# EAGLE board PCB 1d (EAGLE 9.0.1)
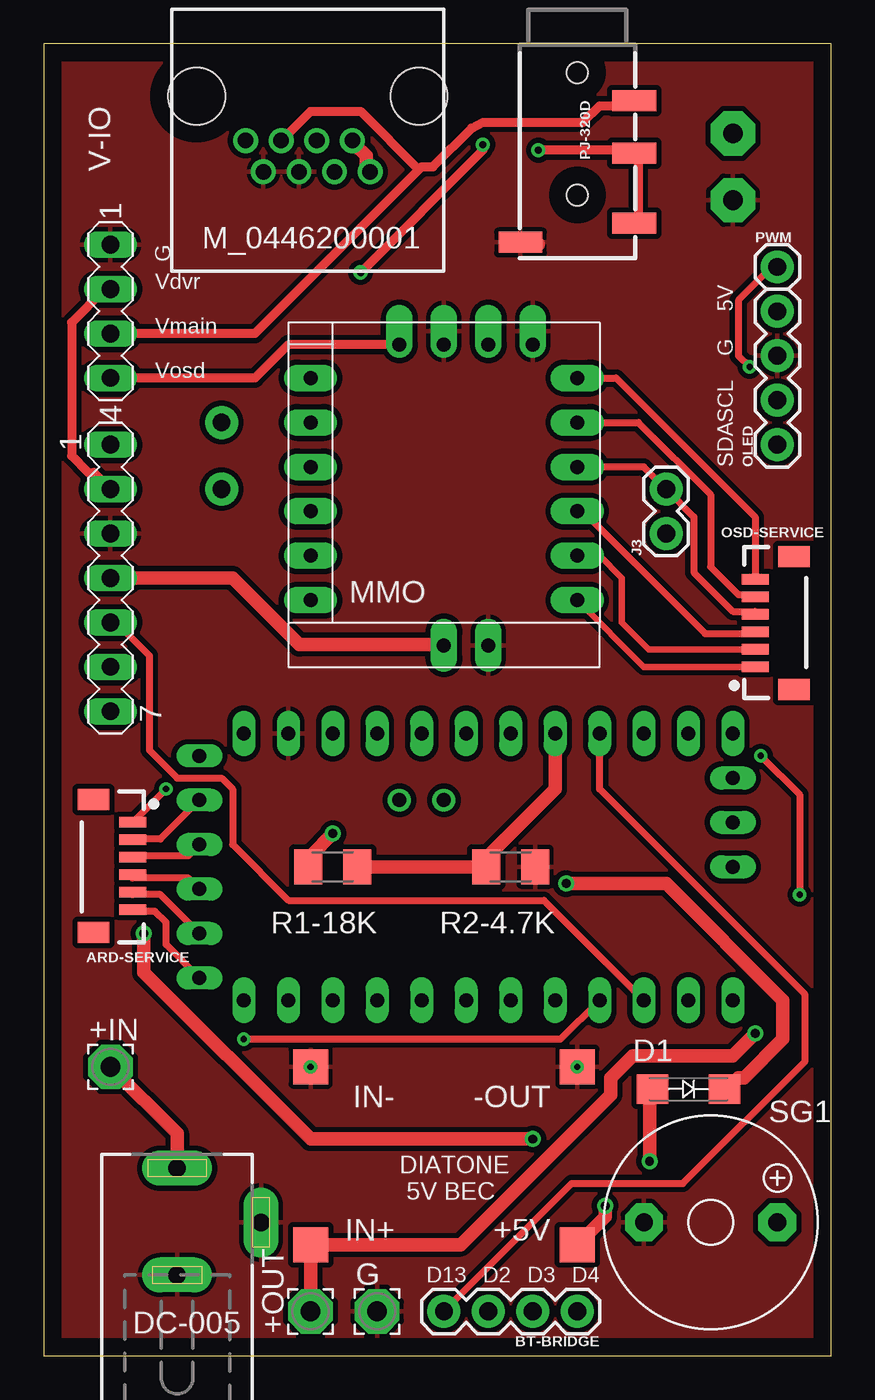
[diagram p0: board, top side]
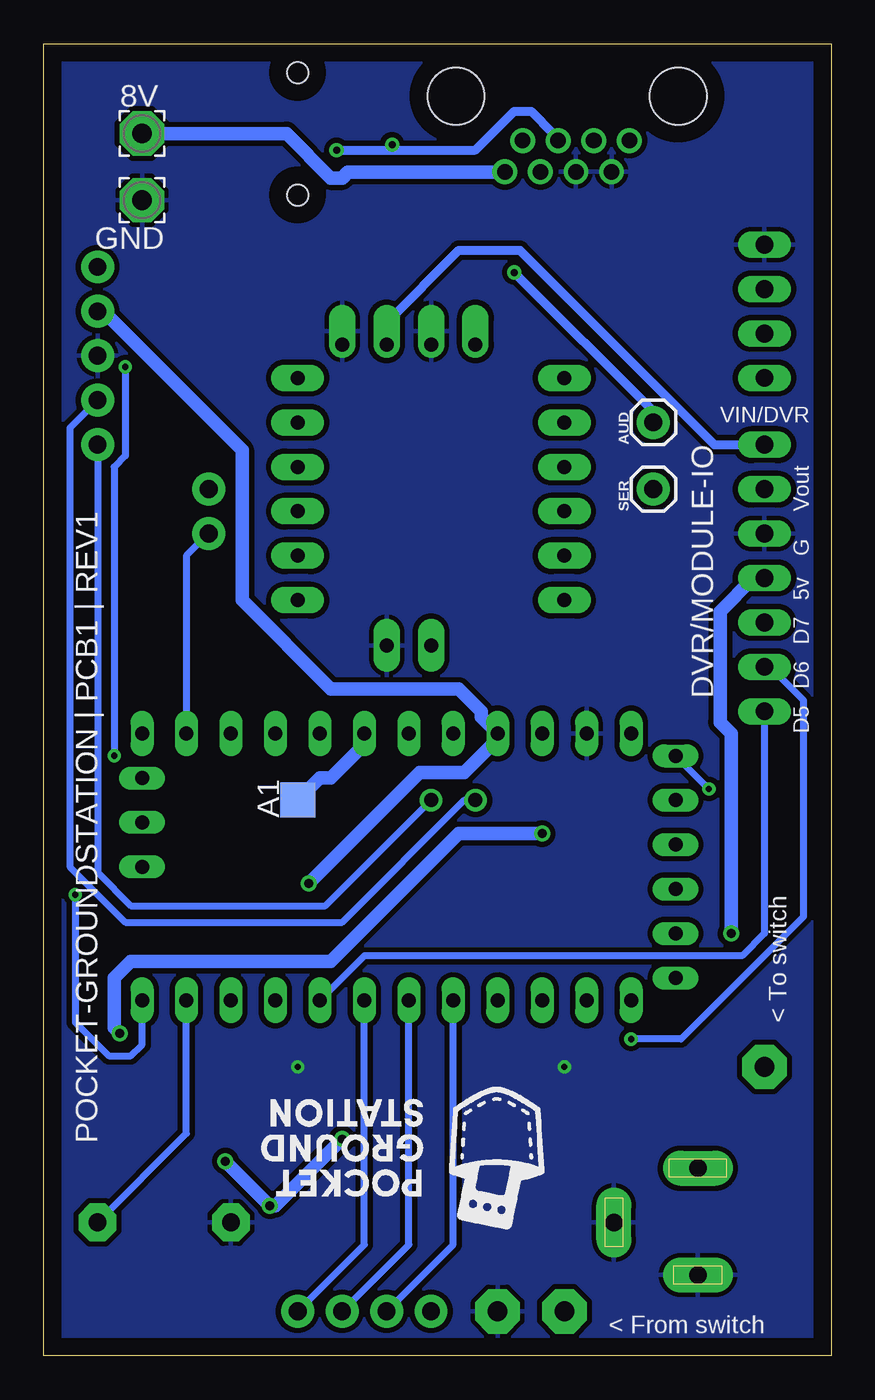
[diagram p1: board, bottom side, seen from below]

Size 44.98 x 74.98 mm. Coordinates in mm from the lower left corner, seen from the top.
Outline: 0,74.98 0,0 44.98,0 44.98,74.98 0,74.98
Copper layers (1*16): Top 0.035mm / dielectric 1.5mm / Bottom 0.035mm
Design rules "PCB Albert *": minimum track width 0.15mm, minimum drill 0.35mm, track to track 0.205mm, track to pad 0.205mm, pad to pad 0.205mm, via to via 0.205mm, smd to smd 6mil, copper to edge 40mil, drill to drill 6mil, minimum pad ring 10mil, minimum via ring 8mil, stop-mask expansion 4mil, vias tented up to drill 0mil, thermal gap 10mil
Net classes: 0 default: width 0.762 mm, drill 0.508 mm, clearance 0.508 mm; 1 thin: width 0.4 mm, drill 0.3 mm, clearance 0.3 mm; 2 medium: width 0.5 mm, drill 0.4 mm, clearance 0.3 mm; 3 d_cl: width 0.762 mm, drill 0.508 mm, clearance 0.3 mm

## Footprints (pad centres in the part's own frame; a part is rotated, then mirrored left to right if it is on the bottom)
2,54/1,1 = drill 1.118 pad 2.54 octagon: 1 0,0
TP20SQ = smd 2 x 2: TP 0,0
1X06-1MM = smd 0.6 x 1.55: 1 -2.54,1.27; 2 -1.54,1.27; 3 -0.54,1.27; 4 0.46,1.27; 5 1.46,1.27; 6 2.46,1.27 | smd 1.2 x 1.8: P$1 -3.84,-0.955; P$2 3.76,-0.955
1X01 = drill 1.016 pad 1.88: 1 0,0
1X04 = drill 1.016 pad 1.88: 1 0,0; 2 2.54,0; 3 5.08,0; 4 7.62,0
SMA-DO214AC = smd 1.8 x 1.7: A -2.05,0; K 2.05,0
DCJ0202 = drill 1 pad 2 long: 1 0,3.1; 2 4.8,0; 3 0,-3
MA07-1 = drill 1.016 long: 1 -7.62,0; 2 -5.08,0; 3 -2.54,0; 4 0,0; 5 2.54,0; 6 5.08,0; 7 7.62,0
1X02 = drill 1.016 pad 1.88: 1 0,0; 2 2.54,0
0446200001 = drill 0.889 pad 1.422: 1 3.556,2.54; 2 2.54,4.318; 3 1.524,2.54; 4 0.508,4.318; 5 -0.508,2.54; 6 -1.524,4.318; 7 -2.54,2.54; 8 -3.556,4.318 | hole 3.251: 6.35,0; -6.35,0
MMOSDNVDVID = drill 0.8 pad 1.524 long: BAT1 -7.62,-3.81; BAT2 -7.62,-1.27; BGND -7.62,-6.35; CGND -7.62,3.81; CUR -7.62,6.35; DTR 7.62,6.35; GND1 7.62,-3.81; GND2 7.62,-6.35; IGND 2.54,-8.93; IVCC 0,-8.93; RSSI -7.62,1.27; RX 7.62,1.27; TX 7.62,3.81; VCC 7.62,-1.27 | drill 0.8 pad 1.524 offset: VGND1 0,8.255; VGND2 5.08,8.255; VIDIN 2.54,8.255; VIDOUT -2.54,8.255
AUDIO_JACK_3.5MM_TRRS_SMD_RA = smd 1.2 x 2.5: EARTH 11.3,-3.25; RING1 6.2,3.25; RING2 3.2,3.25; TIP 10.2,3.25 | hole 1.2: 1.6,0; 8.6,0
M1206 = smd 1.6 x 2: 1 -1.4,0; 2 1.4,0
F/TMB = drill 1.016 pad 2.159 octagon: + 3.81,0; - -3.81,0
ABK-PRO-MINI = drill 0.8 long: 5V 3.81,8.89; A0 10.16,-11.43; A1 10.16,-8.89; A2 10.16,-6.35; A3 10.16,-3.81; A6 5.08,-21.59; A7 7.62,-21.59; BLK 8.89,8.89; D2 -5.08,-3.81; D3 -5.08,-6.35; D4 -5.08,-8.89; D5 -5.08,-11.43; D6 -5.08,-13.97; D7 -5.08,-16.51; D8 -5.08,-19.05; D9 -5.08,-21.59; D10 10.16,-21.59; D11 10.16,-19.05; D12 10.16,-16.51; D13 10.16,-13.97; DTR -3.81,8.89; G 6.35,8.89; GND 10.16,3.81; GND1 -5.08,-1.27; GND4 2.54,-21.59; RAW 10.16,6.35; RST 10.16,1.27; RST1 -5.08,1.27; RX01 1.27,8.89; RX1 -5.08,3.81; TX0 -5.08,6.35; TX01 -1.27,8.89; VCC 10.16,-1.27 | drill 0.8: A4 6.35,-5.08; A5 6.35,-2.54
MA04-1 = drill 1.016 long: 1 -3.81,0; 2 -1.27,0; 3 1.27,0; 4 3.81,0

## Placement (x,y rotation side)
8V  [2,54/1,1]  39.37,69.85 0 bottom
+5V  TPTP20SQ  [TP20SQ]  30.48,6.35 0 top
+IN  [2,54/1,1]  3.81,16.51 270 top
+OUT  [2,54/1,1]  15.24,2.54 0 top
-OUT  TPTP20SQ  [TP20SQ]  30.48,16.51 180 top
A1  TPTP20SQ  [TP20SQ]  30.48,31.75 90 bottom
ARD-SERVICE  EM406  [1X06-1MM]  3.81,27.94 270 top
AUD  [1X01]  10.16,53.34 90 bottom
BT-BRIDGE  [1X04]  30.48,2.54 180 top
D1  GF1  [SMA-DO214AC]  36.83,15.24 0 top
DC-005  DCJ0202  [DCJ0202]  7.62,7.62 0 top
DVR/MODULE-IO  [MA07-1]  3.81,44.45 270 top
G  [2,54/1,1]  19.05,2.54 0 top
GND  [2,54/1,1]  39.37,66.04 180 bottom
IN+  TPTP20SQ  [TP20SQ]  15.24,6.35 0 top
IN-  TPTP20SQ  [TP20SQ]  15.24,16.51 180 top
J3  [1X02]  35.56,46.99 90 top
M_0446200001  0446200001  [0446200001]  15.09,71.98 180 top
MINIMOSD  MICROMINIMOSDPWR  [MMOSDNVDVID]  22.86,49.53 0 top
OLED  [1X04]  41.91,52.07 90 top
OSD-SERVICE  EM406  [1X06-1MM]  41.91,41.91 90 top
PJ-320D  AUDIO_JACK_TRRSSMD_RA  [AUDIO_JACK_3.5MM_TRRS_SMD_RA]  30.48,74.93 270 top
PWM  [1X01]  41.91,62.23 0 top
R1-18K  18k Ohm  [M1206]  16.51,27.94 180 top
R2-4.7K  4.7 kOhm  [M1206]  26.67,27.94 180 top
SER  [1X01]  10.16,49.53 90 bottom
SG1  F/TMB  [F/TMB]  38.1,7.62 0 top
U$1  ABK-PRO-MINI  [ABK-PRO-MINI]  17.78,25.4 90 top
V-IO  [MA04-1]  3.81,59.69 270 top

## Library data of the parts
8V +IN +OUT G GND = wirepad
+5V -OUT A1 IN+ IN- = testpad
ARD-SERVICE OSD-SERVICE = SparkFun-Connectors; PROD_ID: CONN-08249; SF_ID: GPS-00579
AUD J3 PWM SER = SparkFun-Connectors
BT-BRIDGE OLED = SparkFun-Connectors; PROD_ID: CONN-09696
D1 = diode
DC-005 = con-jack; OC_FARNELL: unknown; OC_NEWARK: unknown
DVR/MODULE-IO V-IO = con-lstb; OC_FARNELL: unknown; OC_NEWARK: unknown
M_0446200001 = con-molex; MF: MOLEX; OC_FARNELL: unknown
MINIMOSD = FPVTools
PJ-320D = SparkFun-Connectors; PROD_ID: CONN-10676; SF_ID: PRT-12639
R1-18K R2-4.7K = rcl; SPICEPREFIX: R
SG1 = buzzer; OC_FARNELL: unknown; OC_NEWARK: unknown
U$1 = Arduino-clone

## Nets
8V: 8V.1 M_0446200001.7 M_0446200001.8
+: +IN.1 DC-005.1
+5V: +5V.TP D1.A DVR/MODULE-IO.4 MINIMOSD.IVCC
+5VFTDI [thin]: MINIMOSD.VCC OSD-SERVICE.3
AUDIO [medium]: AUD.1 M_0446200001.5 PJ-320D.RING1 PJ-320D.TIP
BAT1: MINIMOSD.BAT1
BAT2: MINIMOSD.BAT2
BEC-5V: D1.K OLED.4 U$1.VCC
BGND: MINIMOSD.BGND
BUTTON1 [thin]: BT-BRIDGE.3 U$1.D2
BUTTON2 [thin]: BT-BRIDGE.2 U$1.D3
BUTTON3 [thin]: BT-BRIDGE.1 U$1.D4
BUZZER [thin]: SG1.+ U$1.D8
CGND: MINIMOSD.CGND
D5 [thin]: DVR/MODULE-IO.7 U$1.D5
D6 [thin]: DVR/MODULE-IO.6 U$1.D6
D7 [thin]: DVR/MODULE-IO.5 U$1.D7
D9PWM [thin]: PWM.1 U$1.D9
D11-RX [thin]: J3.1 U$1.D11
DTR [thin]: MINIMOSD.DTR OSD-SERVICE.6
DVRVIDEO-IN [medium]: DVR/MODULE-IO.2 V-IO.2
GND [d_cl]: -OUT.TP DC-005.2 DC-005.3 DVR/MODULE-IO.3 G.1 GND.1 IN-.TP M_0446200001.2 M_0446200001.4 MINIMOSD.IGND MINIMOSD.VGND1 MINIMOSD.VGND2 OLED.3 PJ-320D.EARTH R2-4.7K.1 SG1.- U$1.GND V-IO.1
GPSTX [thin]: MINIMOSD.TX OSD-SERVICE.5
LED [thin]: BT-BRIDGE.4 U$1.D13
N$1: A1.TP U$1.A1
N$3 [d_cl]: MINIMOSD.GND1 OSD-SERVICE.2
N$5: MINIMOSD.GND2 OSD-SERVICE.1
N$16 [thin]: ARD-SERVICE.1 U$1.BLK
N$18 [thin]: ARD-SERVICE.2 U$1.G
N$19 [thin]: ARD-SERVICE.3 U$1.5V
N$21 [thin]: ARD-SERVICE.5 U$1.TX01
N$22 [thin]: ARD-SERVICE.6 U$1.DTR
OSDSIGNAL [medium]: MINIMOSD.VIDOUT V-IO.4
RAWVIDEO_MODULE [medium]: DVR/MODULE-IO.1 MINIMOSD.VIDIN
RX [thin]: J3.2 MINIMOSD.RX OSD-SERVICE.4
SCL [thin]: OLED.2 U$1.A5
SDA [thin]: OLED.1 U$1.A4
V [thin]: ARD-SERVICE.4 U$1.RX01
VCC: +OUT.1 IN+.TP R1-18K.2
VMAIN [medium]: M_0446200001.3 PJ-320D.RING2 V-IO.3
VSENS: R1-18K.1 R2-4.7K.2 U$1.A0

## Tracks (layer width: path | path; a pad name or v marks a point on that pad's centre or on a via)
8V
  Top 0.762: M_0446200001.8 18.41,67.94 18.41,68.58 17.78,69.22 M_0446200001.7
  Bottom 0.762: 8V.1 31.11,69.85 28.57,67.31 27.94,67.31 27.62,67.63 18.73,67.63 M_0446200001.8
+
  Top 0.762: DC-005.1 7.62,12.7 +IN.1
+5V  (via drill 0.51)
  Top 0.762: v34.61,11.11 34.61,15.24 D1.A | v32.07,8.57 32.07,7.94 +5V.TP | DVR/MODULE-IO.4 10.79,44.45 14.61,40.64 22.86,40.64 MINIMOSD.IVCC | v27.94,12.38 15.24,12.38 5.71,21.91 v5.71,24.13
  Bottom 0.762: v34.61,11.11 v32.07,8.57 31.75,8.57 v27.94,12.38 | v5.71,24.13 5.71,35.56 6.35,36.2 6.35,42.55 4.45,44.45 DVR/MODULE-IO.4
+5VFTDI
  Top 0.4: MINIMOSD.VCC 30.8,48.26 37.78,41.27 40.64,41.27 OSD-SERVICE.3
AUDIO  (via drill 0.4)
  Top 0.5: v28.26,68.9 33.66,68.9 PJ-320D.RING1 33.97,68.58 33.97,64.77 PJ-320D.TIP 33.66,64.45 | v18.1,61.91 25.08,68.9 v25.08,69.22
  Bottom 0.5: v28.26,68.9 25.08,68.9 | 25.08,68.9 20.32,68.9 18.1,71.12 17.14,71.12 15.88,69.85 15.88,69.53 M_0446200001.5 | AUD.1 10.16,53.98 v18.1,61.91 | 25.08,68.9 v25.08,69.22
BEC-5V  (via drill 0.51)
  Top 0.762: v29.84,26.99 35.56,26.99 42.23,20.32 42.23,18.1 40.01,15.88 39.69,15.88 39.05,15.24 D1.K
  Bottom 0.762: v29.84,26.99 23.5,33.34 20.95,33.34 19.37,34.92 19.05,34.92 U$1.VCC 20,36.51 20,36.83 21.27,38.1 28.57,38.1 33.66,43.18 33.66,51.75 41.59,59.69 OLED.4
BUTTON1
  Bottom 0.4: U$1.D2 21.59,6.35 BT-BRIDGE.3
BUTTON2
  Bottom 0.4: U$1.D3 24.13,6.35 BT-BRIDGE.2
BUTTON3
  Bottom 0.4: U$1.D4 26.67,6.35 BT-BRIDGE.1
BUZZER
  Bottom 0.4: U$1.D8 36.83,12.7 SG1.+
D5
  Bottom 0.4: U$1.D5 26.67,22.86 5.08,22.86 3.81,24.13 DVR/MODULE-IO.7
D6  (via drill 0.35)
  Top 0.4: U$1.D6 29.53,18.1 v11.43,18.1
  Bottom 0.4: v11.43,18.1 8.57,18.1 1.59,25.08 1.59,37.47 3.49,39.37 DVR/MODULE-IO.6
D7
  Top 0.4: U$1.D7 28.57,26.04 13.97,26.04 10.79,29.21 10.79,32.38 10.16,33.02 7.62,33.02 6.03,34.61 6.03,40.01 4.13,41.91 DVR/MODULE-IO.5
D9PWM  (via drill 0.35)
  Top 0.4: v43.18,26.35 43.18,32.07 v40.96,34.29 | v40.32,56.52 39.69,57.15 39.69,60.33 41.59,62.23 PWM.1
  Bottom 0.4: U$1.D9 39.37,17.78 40.01,17.14 41.27,17.14 43.18,19.05 v43.18,26.35 | v40.96,34.29 40.96,50.8 40.32,51.44 v40.32,56.52
D11-RX
  Bottom 0.4: U$1.D11 36.83,45.72 J3.1
DTR
  Top 0.4: OSD-SERVICE.6 40.64,47.94 32.7,55.88 MINIMOSD.DTR
DVRVIDEO-IN
  Top 0.5: DVR/MODULE-IO.2 2.86,50.48 2.54,50.48 1.59,51.44 1.59,59.05 3.49,60.96 V-IO.2
GND  (via drill 0.35)
  Top 0.762: 28.26,63.55 28.26,63.5 PJ-320D.EARTH
  other vias: 15.24,16.51 30.48,16.51
  pour Bottom: -1.27,76.2 -1.27,-1.27 45.72,-1.27 45.72,76.2
  pour Top: -2.54,77.47 46.99,77.47 46.99,-2.54 -2.54,-2.54
GPSTX
  Top 0.4: MINIMOSD.TX 33.97,53.34 38.1,49.21 38.1,45.09 39.69,43.5 40.64,43.5 OSD-SERVICE.5
LED
  Top 0.4: U$1.D13 31.75,32.38 43.5,20.64 43.5,16.83 36.51,9.84 30.16,9.84 BT-BRIDGE.4
N$1
  Bottom 0.762: A1.TP 29.21,33.02 28.57,33.02 26.67,34.92 U$1.A1
N$3
  Top 0.381: OSD-SERVICE.2 34.56,40.37 33.02,41.91 33.02,44.45 31.75,45.72 MINIMOSD.GND1
N$5
  Top 0.381: OSD-SERVICE.1 34.29,39.37 MINIMOSD.GND2
N$16  (via drill 0.35)
  Top 0.4: v6.99,32.38 ARD-SERVICE.1
  Bottom 0.4: U$1.BLK v6.99,32.38
N$18
  Top 0.4: U$1.G 6.67,29.53 5.08,29.53 ARD-SERVICE.2
N$19
  Top 0.4: U$1.5V 8.26,28.57 5.08,28.57 ARD-SERVICE.3
N$21
  Top 0.4: U$1.TX01 6.67,26.35 5.08,26.35 ARD-SERVICE.5
N$22
  Top 0.4: U$1.DTR 6.99,23.5 6.99,24.77 6.35,25.4 5.08,25.4 ARD-SERVICE.6
OSDSIGNAL
  Top 0.5: V-IO.4 12.06,55.88 13.97,57.78 MINIMOSD.VIDOUT
RAWVIDEO_MODULE
  Bottom 0.5: DVR/MODULE-IO.1 6.67,52.07 17.78,63.18 21.27,63.18 25.4,59.05 MINIMOSD.VIDIN
RX
  Top 0.4: OSD-SERVICE.4 40.64,42.55 39.37,42.55 37.15,44.77 37.15,47.94 J3.2 34.29,50.8 MINIMOSD.RX
SCL
  Bottom 0.4: U$1.A5 20.95,31.75 27.94,24.77 40.32,24.77 43.5,27.94 43.5,53.02 OLED.2
SDA
  Bottom 0.4: U$1.A4 28.89,25.72 40.01,25.72 41.91,27.62 OLED.1
V
  Top 0.4: U$1.RX01 8.26,27.3 5.08,27.3 ARD-SERVICE.4
VCC  (via drill 0.51)
  Top 0.762: +OUT.1 IN+.TP 23.81,6.35 32.38,14.92 32.38,15.88 33.66,17.14 39.37,17.14 v40.64,18.41 | v16.51,29.84 15.24,28.57 15.24,27.94 R1-18K.2
  Bottom 0.762: v16.51,29.84 21.27,29.84 28.57,22.54 40.01,22.54 40.96,21.59 40.96,18.73 v40.64,18.41
VMAIN
  Top 0.5: 21.43,67.79 18.1,71.12 15.24,71.12 M_0446200001.3 | V-IO.3 12.06,58.42 21.43,67.79 | PJ-320D.RING2 33.66,71.44 31.75,71.44 30.8,70.48 25.08,70.48 24.45,70.17 22.23,67.94 21.59,67.94 21.43,67.79
VSENS
  Top 0.762: R1-18K.1 R2-4.7K.2 25.08,28.26 29.21,32.38 U$1.A0

## Text on the board
tPlace: DIATONE / 5V BEC
tNames: G | Vdvr | 5V | Vmain | G | Vosd | SCL | SDA | D13 | D2 | D3 | D4
bNames: VIN/DVR | Vout | POCKET-GROUNDSTATION | PCB1 | REV1 | G | 5v | D7 | D6 | D5 | < To switch | < From switch